# EAGLE board Speccy2007_128K_Ljubitel.bak1 (EAGLE 6.3)
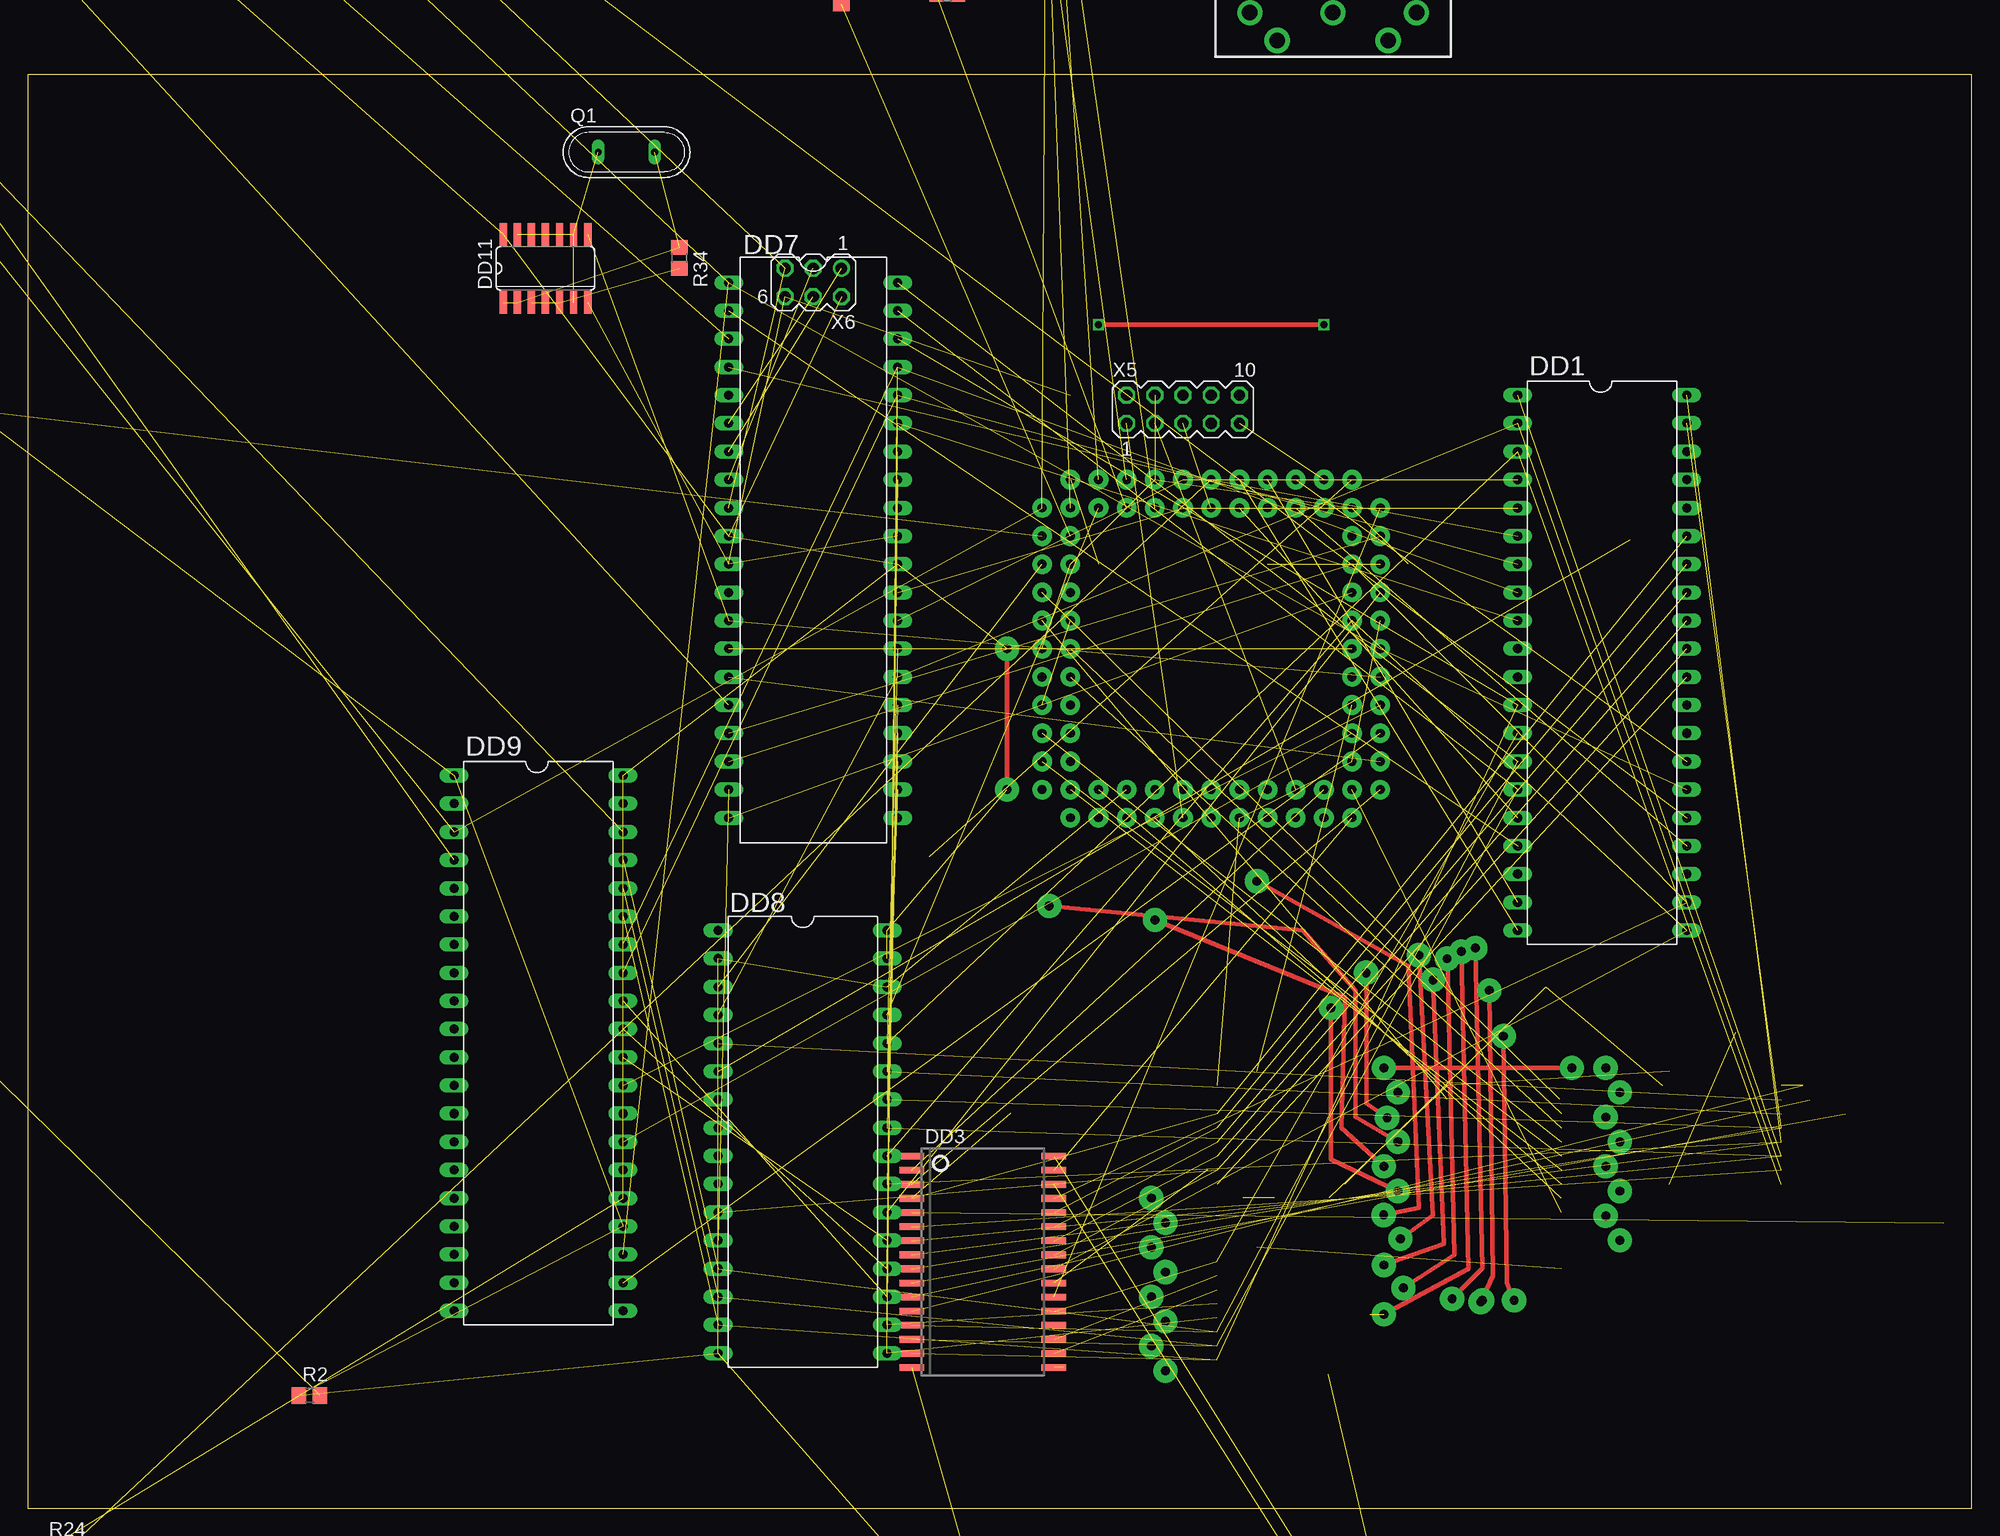
[diagram p0: board, top side]
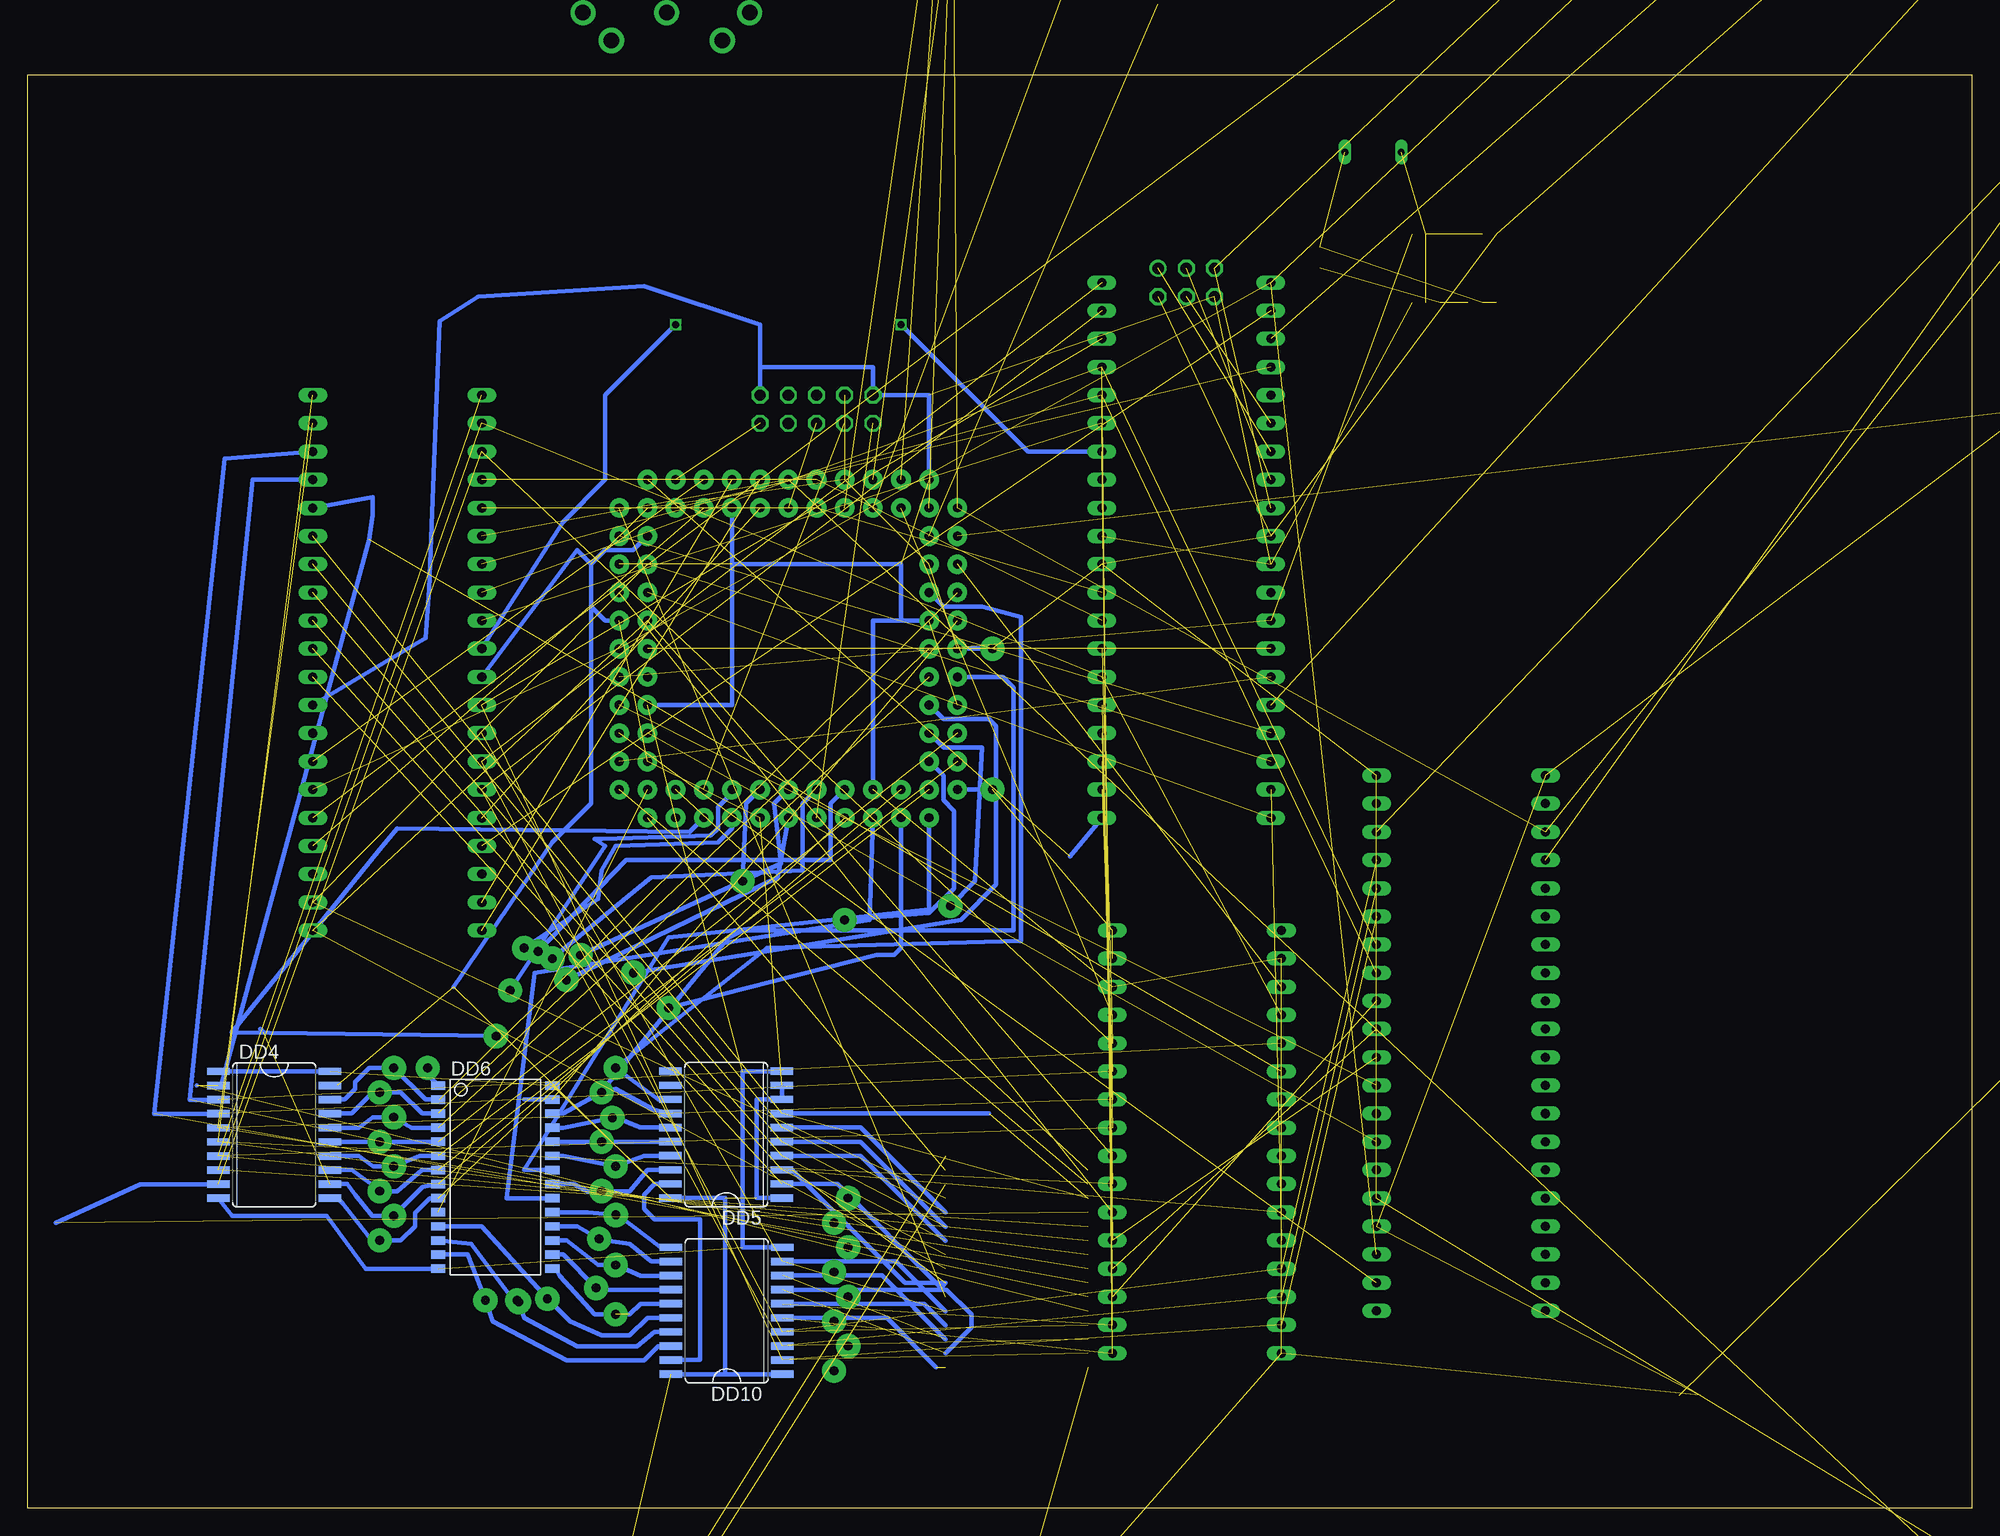
[diagram p1: board, bottom side, seen from below]

Size 175.24 x 129.21 mm. Coordinates in mm from the lower left corner, seen from the top.
Outline: 0,0 175.24,0 175.24,129.21 0,129.21 0,0
Copper layers (1*16): Top 0.035mm / dielectric 1.5mm / Bottom 0.035mm
Design rules "default": minimum track width 10mil, minimum drill 0.6mm, track to track 8mil, track to pad 8mil, pad to pad 8mil, via to via 8mil, smd to smd 8mil, copper to edge 40mil, drill to drill 8mil, minimum pad ring 10mil, minimum via ring 8mil, stop-mask expansion 4mil, vias tented up to drill 0mil, thermal gap 10mil

## Footprints (pad centres in the part's own frame; a part is rotated, then mirrored left to right if it is on the bottom)
C0805 = smd 1.3 x 1.5: 1 -0.95,0; 2 0.95,0
DIL40 = drill 0.813 long: 1 -24.13,-7.62; 2 -21.59,-7.62; 3 -19.05,-7.62; 4 -16.51,-7.62; 5 -13.97,-7.62; 6 -11.43,-7.62; 7 -8.89,-7.62; 8 -6.35,-7.62; 9 -3.81,-7.62; 10 -1.27,-7.62; 11 1.27,-7.62; 12 3.81,-7.62; 13 6.35,-7.62; 14 8.89,-7.62; 15 11.43,-7.62; 16 13.97,-7.62; 17 16.51,-7.62; 18 19.05,-7.62; 19 21.59,-7.62; 20 24.13,-7.62; 21 24.13,7.62; 22 21.59,7.62; 23 19.05,7.62; 24 16.51,7.62; 25 13.97,7.62; 26 11.43,7.62; 27 8.89,7.62; 28 6.35,7.62; 29 3.81,7.62; 30 1.27,7.62; 31 -1.27,7.62; 32 -3.81,7.62; 33 -6.35,7.62; 34 -8.89,7.62; 35 -11.43,7.62; 36 -13.97,7.62; 37 -16.51,7.62; 38 -19.05,7.62; 39 -21.59,7.62; 40 -24.13,7.62
PGA-84 = drill 0.8 pad 1.778: 1 5.08,5.08; 2 5.08,2.54; 3 2.54,5.08; 4 2.54,2.54; 5 0,5.08; 6 0,2.54; 7 -2.54,5.08; 8 -2.54,2.54; 9 -5.08,5.08; 10 -5.08,2.54; 11 -7.62,5.08; 12 -10.16,2.54; 13 -7.62,2.54; 14 -10.16,0; 15 -7.62,0; 16 -10.16,-2.54; 17 -7.62,-2.54; 18 -10.16,-5.08; 19 -7.62,-5.08; 20 -10.16,-7.62; 21 -7.62,-7.62; 22 -10.16,-10.16; 23 -7.62,-10.16; 24 -10.16,-12.7; 25 -7.62,-12.7; 26 -10.16,-15.24; 27 -7.62,-15.24; 28 -10.16,-17.78; 29 -7.62,-17.78; 30 -10.16,-20.32; 31 -7.62,-20.32; 32 -10.16,-22.86; 33 -7.62,-25.4; 34 -7.62,-22.86; 35 -5.08,-25.4; 36 -5.08,-22.86; 37 -2.54,-25.4; 38 -2.54,-22.86; 39 0,-25.4; 40 0,-22.86; 41 2.54,-25.4; 42 2.54,-22.86; 43 5.08,-25.4; 44 5.08,-22.86; 45 7.62,-25.4; 46 7.62,-22.86; 47 10.16,-25.4; 48 10.16,-22.86; 49 12.7,-25.4; 50 12.7,-22.86; 51 15.24,-25.4; 52 15.24,-22.86; 53 17.78,-25.4; 54 20.32,-22.86; 55 17.78,-22.86; 56 20.32,-20.32; 57 17.78,-20.32; 58 20.32,-17.78; 59 17.78,-17.78; 60 20.32,-15.24; 61 17.78,-15.24; 62 20.32,-12.7; 63 17.78,-12.7; 64 20.32,-10.16; 65 17.78,-10.16; 66 20.32,-7.62; 67 17.78,-7.62; 68 20.32,-5.08; 69 17.78,-5.08; 70 20.32,-2.54; 71 17.78,-2.54; 72 20.32,0; 73 17.78,0; 74 20.32,2.54; 75 17.78,5.08; 76 17.78,2.54; 77 15.24,5.08; 78 15.24,2.54; 79 12.7,5.08; 80 12.7,2.54; 81 10.16,5.08; 82 10.16,2.54; 83 7.62,5.08; 84 7.62,2.54
SOP32L = smd 0.6 x 2.2: 1 -9.525,-6.416; 2 -8.255,-6.416; 3 -6.985,-6.416; 4 -5.715,-6.416; 5 -4.445,-6.416; 6 -3.175,-6.416; 7 -1.905,-6.416; 8 -0.635,-6.416; 9 0.635,-6.416; 10 1.905,-6.416; 11 3.175,-6.416; 12 4.445,-6.416; 13 5.715,-6.416; 14 6.985,-6.416; 15 8.255,-6.416; 16 9.525,-6.416; 17 9.525,6.416; 18 8.255,6.416; 19 6.985,6.416; 20 5.715,6.416; 21 4.445,6.416; 22 3.175,6.416; 23 1.905,6.416; 24 0.635,6.416; 25 -0.635,6.416; 26 -1.905,6.416; 27 -3.175,6.416; 28 -4.445,6.416; 29 -5.715,6.416; 30 -6.985,6.416; 31 -8.255,6.416; 32 -9.525,6.416
SO20W = smd 0.66 x 2.032: 1 -5.715,-5.029; 2 -4.445,-5.029; 3 -3.175,-5.029; 4 -1.905,-5.029; 5 -0.635,-5.029; 6 0.635,-5.029; 7 1.905,-5.029; 8 3.175,-5.029; 9 4.445,-5.029; 10 5.715,-5.029; 11 5.715,5.029; 12 4.445,5.029; 13 3.175,5.029; 14 1.905,5.029; 15 0.635,5.029; 16 -0.635,5.029; 17 -1.905,5.029; 18 -3.175,5.029; 19 -4.445,5.029; 20 -5.715,5.029
SO28L = smd 0.762 x 1.27: 1 -7.62,-5.207; 2 -6.35,-5.207; 3 -5.08,-5.207; 4 -3.81,-5.207; 5 -2.54,-5.207; 6 -1.27,-5.207; 7 0,-5.207; 8 1.27,-5.207; 9 2.54,-5.207; 10 3.81,-5.207; 11 5.08,-5.207; 12 6.35,-5.207; 13 7.62,-5.207; 14 8.89,-5.207; 15 8.89,5.08; 16 7.62,5.08; 17 6.35,5.08; 18 5.08,5.08; 19 3.81,5.08; 20 2.54,5.08; 21 1.27,5.08; 22 0,5.08; 23 -1.27,5.08; 24 -2.54,5.08; 25 -3.81,5.08; 26 -5.08,5.08; 27 -6.35,5.08; 28 -7.62,5.08
DIL32 = drill 0.813 long: 1 -19.05,-7.62; 2 -16.51,-7.62; 3 -13.97,-7.62; 4 -11.43,-7.62; 5 -8.89,-7.62; 6 -6.35,-7.62; 7 -3.81,-7.62; 8 -1.27,-7.62; 9 1.27,-7.62; 10 3.81,-7.62; 11 6.35,-7.62; 12 8.89,-7.62; 13 11.43,-7.62; 14 13.97,-7.62; 15 16.51,-7.62; 16 19.05,-7.62; 17 19.05,7.62; 18 16.51,7.62; 19 13.97,7.62; 20 11.43,7.62; 21 8.89,7.62; 22 6.35,7.62; 23 3.81,7.62; 24 1.27,7.62; 25 -1.27,7.62; 26 -3.81,7.62; 27 -6.35,7.62; 28 -8.89,7.62; 29 -11.43,7.62; 30 -13.97,7.62; 31 -16.51,7.62; 32 -19.05,7.62
SO14 = smd 0.66 x 2.032: 1 -3.81,-3.073; 2 -2.54,-3.073; 3 -1.27,-3.073; 4 0,-3.073; 5 1.27,-3.073; 6 2.54,-3.073; 7 3.81,-3.073; 8 3.81,3.073; 9 2.54,3.073; 10 1.27,3.073; 11 0,3.073; 12 -1.27,3.073; 13 -2.54,3.073; 14 -3.81,3.073
TSOP48 = smd 1.1 x 0.3: 1 -9.625,5.75; 2 -9.625,5.25; 3 -9.625,4.75; 4 -9.625,4.25; 5 -9.625,3.75; 6 -9.625,3.25; 7 -9.625,2.75; 8 -9.625,2.25; 9 -9.625,1.75; 10 -9.625,1.25; 11 -9.625,0.75; 12 -9.625,0.25; 13 -9.625,-0.25; 14 -9.625,-0.75; 15 -9.625,-1.25; 16 -9.625,-1.75; 17 -9.625,-2.25; 18 -9.625,-2.75; 19 -9.625,-3.25; 20 -9.625,-3.75; 21 -9.625,-4.25; 22 -9.625,-4.75; 23 -9.625,-5.25; 24 -9.625,-5.75; 25 9.625,-5.75; 26 9.625,-5.25; 27 9.625,-4.75; 28 9.625,-4.25; 29 9.625,-3.75; 30 9.625,-3.25; 31 9.625,-2.75; 32 9.625,-2.25; 33 9.625,-1.75; 34 9.625,-1.25; 35 9.625,-0.75; 36 9.625,-0.25; 37 9.625,0.25; 38 9.625,0.75; 39 9.625,1.25; 40 9.625,1.75; 41 9.625,2.25; 42 9.625,2.75; 43 9.625,3.25; 44 9.625,3.75; 45 9.625,4.25; 46 9.625,4.75; 47 9.625,5.25; 48 9.625,5.75
A0R-JMP = smd 1.5 x 1.3: 1 0,1.7; 2 0,0; 3 0,-1.7
QS = drill 0.61 long: 1 -2.54,0; 2 2.54,0
R0805 = smd 1.3 x 1.5: 1 -0.95,0; 2 0.95,0
DIN_5_FEMALE_SUPPORT = drill 1.4 pad 2.286: 1 7.94,3.6; 2 0.46,3.61; 3 -7.07,3.6; 4 5.47,6.13; 5 -4.53,6.12; 6 -4.53,-6.382; 7 5.478,-6.382
MINI-DIN6 = drill 0.9: 1 -1.3,-8.5; 2 1.3,-8.5; 3 -3.4,-8.5; 4 3.4,-8.5; 5 -3.4,-11; 6 3.4,-11 | drill 2.2: P$1 0,-4.7
MA05-2 = drill 1.016 octagon: 1 -5.08,-1.27; 2 -5.08,1.27; 3 -2.54,-1.27; 4 -2.54,1.27; 5 0,-1.27; 6 0,1.27; 7 2.54,-1.27; 8 2.54,1.27; 9 5.08,-1.27; 10 5.08,1.27
MA03-2 = drill 1.016: 1 -2.54,-1.27 | drill 1.016 octagon: 2 -2.54,1.27; 3 0,-1.27; 4 0,1.27; 5 2.54,-1.27; 6 2.54,1.27

## Placement (x,y rotation side)
C13  1m  [C0805]  -64.77,161.29 0 top  (outside the outline)
C14  1m  [C0805]  -64.77,149.86 0 top  (outside the outline)
C15  0.1  [C0805]  -64.77,166.37 0 top  (outside the outline)
DD1  Z80  [DIL40]  141.92,76.2 270 top
DD2  EPM7128-J84  [PGA-84]  116.84,82.55 270 top
DD3  621024  [SOP32L]  86.09,22.2 270 top
DD4  74HCT245DW  [SO20W]  153.03,33.65 270 bottom
DD5  74HCT245DW  [SO20W]  112.28,33.67 90 bottom
DD6  62256  [SO28L]  133.03,30.48 270 bottom
DD7  MEGA16-P  [DIL40]  70.8,86.36 270 top
DD8  W29C020C  [DIL32]  69.85,33.02 270 top
DD9  YM2149F  [DIL40]  46.04,41.91 270 top
DD10  74HCT245DW  [SO20W]  112.23,17.79 90 bottom
DD11  74HC00D  [SO14]  46.67,111.76 0 top
IC1  SST39LF800A  [TSOP48]  81.88,-24.13 0 top  (outside the outline)
JMP1  [A0R-JMP]  124.78,-21.59 0 top  (outside the outline)
Q1  14Mhz  [QS]  53.98,122.24 0 top
R1  4k7  [R0805]  -71.12,106.68 0 top  (outside the outline)
R2  2k2  [R0805]  25.4,10.16 0 top
R4  330  [R0805]  73.34,136.53 90 top  (outside the outline)
R5  470  [R0805]  82.87,136.53 0 top  (outside the outline)
R6  470  [R0805]  92.71,158.75 0 top  (outside the outline)
R7  470  [R0805]  92.71,146.05 0 top  (outside the outline)
R8  330  [R0805]  92.71,165.1 0 top  (outside the outline)
R9  330  [R0805]  92.71,152.4 0 top  (outside the outline)
R10  330  [R0805]  92.71,139.7 0 top  (outside the outline)
R19  10k  [R0805]  -64.77,236.22 0 top  (outside the outline)
R20  10k  [R0805]  -64.77,229.87 0 top  (outside the outline)
R21  10k  [R0805]  -64.77,223.52 0 top  (outside the outline)
R22  4k7  [R0805]  -64.77,217.17 0 top  (outside the outline)
R23  4k7  [R0805]  -64.77,210.82 0 top  (outside the outline)
R24  2k2  [R0805]  2.54,-3.81 0 top  (outside the outline)
R25  1k  [R0805]  -64.77,204.47 0 top  (outside the outline)
R26  2k  [R0805]  -64.77,198.12 0 top  (outside the outline)
R27  2k  [R0805]  -64.77,191.77 0 top  (outside the outline)
R28  1k  [R0805]  -64.77,185.42 0 top  (outside the outline)
R29  5k1  [R0805]  -64.77,156.21 0 top  (outside the outline)
R30  4k7  [R0805]  -64.77,179.07 0 top  (outside the outline)
R31  4k7  [R0805]  -64.77,172.72 0 top  (outside the outline)
R32  5k1  [R0805]  -64.77,143.51 0 top  (outside the outline)
R33  4k7  [R0805]  -64.77,137.16 0 top  (outside the outline)
R34  360  [R0805]  58.74,112.71 270 top
U$1  MIDI_CONN_FEMALE_SUPPORT  [DIN_5_FEMALE_SUPPORT]  118.11,138.43 180 top  (outside the outline)
U$2  MINI-DIN6PTH  [MINI-DIN6]  77.47,162.56 0 top  (outside the outline)
X5  ByteBlaster  [MA05-2]  104.14,99.06 0 top
X6  AVRISP  [MA03-2]  70.8,110.49 180 top

## Library data of the parts
C13-C15 R1 R2 R4-R10 R19-R34 = rcl
DD1 = zilog
DD2 = altera_pga84
DD3 IC1 = memory
DD4 DD5 DD10 DD11 = 74xx-eu
DD6 = memory-hitachi; MPN: CY62256VNLL-70SNXI; OC_FARNELL: 1650073; OC_NEWARK: 19M2582
DD7 = atmel; MPN: ATMEGA16-16PU; OC_FARNELL: 9171142; OC_NEWARK: 01M6885
DD8 = w29c020
DD9 = ref-pack_
JMP1 = jump-0r-smd
Q1 = special
U$1 U$2 = SparkFun-Connectors
X5 X6 = con-lstb; OC_FARNELL: unknown; OC_NEWARK: unknown

## Nets
+3V3: JMP1.3
+5V: DD1.11 DD2.3 DD2.13 DD2.26 DD2.38 DD2.43 DD2.53 DD2.66 DD2.78 DD3.32 DD4.1 DD4.20 DD5.1 DD5.8 DD5.9 DD5.20 DD6.28 DD7.10 DD7.30 DD8.31 DD8.32 DD9.25 DD9.28 DD9.40 DD10.1 DD10.20 DD11.14 JMP1.1 R19.1 R20.1 R21.1 R22.1 R23.1 R24.1 X5.4 X6.2
A: DD9.4 R25.1
A0: DD1.30 DD3.23 DD5.2 DD7.19 DD8.12
A1: DD1.31 DD3.25 DD5.3 DD8.11
A2: DD1.32 DD3.26 DD5.4 DD8.10
A3: DD1.33 DD3.27 DD5.5 DD8.9
A4: DD1.34 DD3.28 DD5.6 DD8.8
A5: DD1.35 DD3.4 DD5.7 DD8.7
A6: DD1.36 DD3.12 DD4.2 DD8.6
A7: DD1.37 DD3.11 DD4.3 DD8.5
A8: DD1.38 DD3.10 DD4.4 DD7.22 DD8.27
A9: DD1.39 DD3.9 DD4.5 DD7.23 DD8.26
A10: DD1.40 DD3.8 DD4.6 DD7.24 DD8.23
A11: DD1.1 DD3.7 DD4.7 DD7.25 DD8.25
A12: DD1.2 DD3.6 DD4.8 DD7.26 DD8.4
A13: DD1.3 DD3.5 DD4.9 DD7.27 DD8.28
A14: DD1.4 DD2.24 DD7.28
A15: DD1.5 DD2.25 DD7.29
AVR_INT: DD2.9 DD7.17
AVR_NOINT: DD2.6 DD7.20
AVR_PROM: DD2.2 DD7.14
AVR_RST: DD7.9 R19.2 X6.5
AVR_TRDOS: DD2.77 DD7.15
AVR_WAIT: DD2.15 DD7.4
AY_BC: DD2.81 DD9.29
AY_BDIR: DD2.80 DD9.27
AY_CLK: DD2.79 DD9.22
B: DD2.33 DD9.3 R10.1 R26.1 R27.1
BB: DD2.28 R7.1
BG: DD2.27 R6.1
BR: DD2.29 R5.1
BUSRQ: DD1.25 R21.2
C: DD9.38 R28.1
CLK: DD2.83 DD7.13 DD11.8
CLK_CPU: DD1.6 DD2.22 R24.2
D0: DD1.14 DD3.13 DD7.40 DD8.13 DD9.37 DD10.4
D1: DD1.15 DD3.14 DD7.39 DD8.14 DD9.36 DD10.3
D2: DD1.12 DD3.15 DD7.38 DD8.15 DD9.35 DD10.2
D3: DD1.8 DD3.17 DD7.37 DD8.17 DD9.34 DD10.5
D4: DD1.7 DD3.20 DD7.36 DD8.18 DD9.33 DD10.6
D5: DD1.9 DD3.18 DD7.35 DD8.19 DD9.32 DD10.7
D6: DD1.10 DD3.19 DD7.34 DD8.20 DD9.31 DD10.8
D7: DD1.13 DD3.21 DD7.33 DD8.21 DD9.30 DD10.9
G: DD2.34 R9.1
GND: DD1.29 DD2.7 DD2.19 DD2.32 DD2.42 DD2.47 DD2.59 DD2.72 DD2.82 DD3.16 DD4.10 DD5.10 DD6.14 DD7.11 DD7.31 DD8.2 DD8.16 DD8.30 DD9.1 DD9.24 DD10.10 DD11.7 IC1.27 IC1.46 R2.1 R29.2 R32.2 X5.2 X5.10 X6.6
INT: DD1.16 DD2.21
IOREQ: DD1.20 DD2.20
KCLK: DD7.16 R23.2
KDAT: DD7.3 R22.2
M1: DD1.27 DD2.16
MISO: DD7.7 X6.1
MOSI: DD7.6 X6.4
MREQ: DD1.19 DD2.18
N$1: DD11.1 DD11.2 Q1.2 R34.1
N$2: C15.1 R30.2 R31.2
N$3: C15.2 R33.1
N$4: C13.1 R25.2 R26.2 R29.1 R30.1
N$5: DD11.3 DD11.4 DD11.5 R34.2
N$6: R4.2
N$7: C14.1 R27.2 R28.2 R31.1 R32.1
N$8: R5.2 R8.2
N$9: R6.2 R9.2
N$10: R7.2 R10.2
N$11: U$1.3
N$12: DD11.6 DD11.9 DD11.10 DD11.12 DD11.13 Q1.1
N$21: DD3.30 JMP1.2
NMI: DD1.17 DD7.2
R: DD2.30 R8.1
RAM_A14: DD2.75 DD3.3
RAM_A15: DD2.74 DD3.31
RAM_A16: DD2.73 DD3.2
RAM_CS: DD2.11 DD3.22
RD: DD1.21 DD2.4 DD3.24 DD8.24
ROM_A14: DD2.31 DD8.29
ROM_A15: DD2.37 DD8.3
ROM_CS: DD2.5 DD8.22
RST_CPU: DD1.26 DD2.1 DD7.1 DD9.23 R20.2
SCK: DD7.8 X6.3
SDC: DD7.5
SOUND_L: C14.2 R1.1 R2.2
SOUND_R: C13.2
SPEAKER: DD2.35 R1.2 R33.2
SYNC: DD2.36 R4.1
TAPE_IN: DD2.12 DD7.21
TCK: DD2.62 X5.1
TDI: DD2.14 X5.9
TDO: DD2.71 X5.3
TMS: DD2.23 X5.5
VA0: DD2.56 DD5.18 DD6.21
VA1: DD2.52 DD5.17 DD6.23
VA2: DD2.50 DD5.16 DD6.24
VA3: DD2.48 DD5.15 DD6.25
VA4: DD2.45 DD5.14 DD6.26
VA5: DD2.40 DD5.13 DD6.1
VA6: DD2.39 DD4.18 DD6.2
VA7: DD2.44 DD4.17 DD6.3
VA8: DD2.46 DD4.16 DD6.4
VA9: DD2.49 DD4.15 DD6.5
VA10: DD2.51 DD4.14 DD6.6
VA11: DD2.55 DD4.13 DD6.7
VA12: DD2.57 DD4.12 DD6.8
VA13: DD2.60 DD4.11 DD6.9
VA14: DD2.76 DD6.10
VAGEN: DD2.10 DD4.19 DD5.19 DD10.19
VD0: DD2.68 DD6.11 DD10.16
VD1: DD2.69 DD6.12 DD10.17
VD2: DD2.70 DD6.13 DD10.18
VD3: DD2.61 DD6.15 DD10.15
VD4: DD2.63 DD6.16 DD10.14
VD5: DD2.64 DD6.17 DD10.13
VD6: DD2.65 DD6.18 DD10.12
VD7: DD2.67 DD6.19 DD10.11
VDD: IC1.37
VRAM: DD2.58 DD6.20
VRD: DD2.54 DD6.22
VWR: DD2.41 DD6.27
WAIT_CPU: DD1.24 DD2.17
WR: DD1.22 DD2.8 DD3.29 DD7.18

## Tracks (layer width: path | path; a pad name or v marks a point on that pad's centre or on a via)
+5V  (via drill 0.8 pad 2.18)  (28 unrouted)
  Top 0.406: v88.27,77.47 v88.27,64.77
  Bottom 0.406: DD1.11 125.73,86.36 124.46,85.09 124.46,81.28 123.19,80.01 DD2.3 | DD4.1 DD4.20 | DD10.1 DD10.20 112.39,12.07 112.39,27.95 DD5.20 | DD2.43 v88.27,77.47 | v88.27,64.77 DD2.53 | DD5.1 109.54,27.95 109.54,36.83 DD5.8 DD5.9
A  (1 unrouted)
A0  (4 unrouted)
  Bottom 0.406: DD5.2 102.25,29.22 93.03,20 92.8,20 DD3.23 96.18,20.3 106.36,30.48
A1  (3 unrouted)
A2  (3 unrouted)
  Bottom 0.406: DD5.4 100.16,31.76 DD3.26
A3  (3 unrouted)
  Bottom 0.406: DD5.5 100.16,33.03 DD3.27
A4  (3 unrouted)
  Bottom 0.406: DD5.6 100.16,34.3 DD3.28
A5  (3 unrouted)
  Bottom 0.406: DD5.7 88.59,35.57 88.58,35.56
A6  (3 unrouted)
  Bottom 0.406: DD4.2 157.8,38.09 144.46,87.31 144.15,89.53 144.15,91.12 DD1.36 | 160.01,38.09 160.02,38.1
A7  (2 unrouted)
  Bottom 0.406: DD4.3 160.66,36.82 154.94,92.71 DD1.37
A8  (3 unrouted)
  Bottom 0.406: DD4.4 163.83,35.55 157.48,94.61 DD1.38
A9  (4 unrouted)
A10  (4 unrouted)
A11  (4 unrouted)
A12  (4 unrouted)
A13  (4 unrouted)
  Bottom 0.406: DD4.9 165.11,29.2 172.72,25.72
A14  (2 unrouted)
A15  (2 unrouted)
AVR_INT  (1 unrouted)
AVR_NOINT  (1 unrouted)
AVR_PROM  (1 unrouted)
AVR_RST  (2 unrouted)
AVR_TRDOS  (1 unrouted)
AVR_WAIT  (1 unrouted)
AY_BC  (1 unrouted)
AY_BDIR  (1 unrouted)
AY_CLK  (1 unrouted)
B  (4 unrouted)
BB  (1 unrouted)
BG  (1 unrouted)
BR  (1 unrouted)
BUSRQ  (1 unrouted)
C  (1 unrouted)
CLK  (2 unrouted)
CLK_CPU  (2 unrouted)
D0  (5 unrouted)
D1  (5 unrouted)
D2  (5 unrouted)
D3  (5 unrouted)
  Bottom 0.406: DD10.5 97.8,17.16 93.34,12.7
D4  (5 unrouted)
  Bottom 0.406: DD10.6 94.44,18.43 DD3.20
D5  (5 unrouted)
  Bottom 0.406: DD10.7 92.4,19.7 90.17,17.46 90.17,16.28 DD3.18
D6  (via drill 0.6)  (4 unrouted)
  Top 0.406: v116.84,106.68 v96.52,106.68
  Bottom 0.406: DD1.10 127,88.9 123.19,92.71 123.19,100.33 v116.84,106.68 | v96.52,106.68 85.09,95.25 DD7.34 | DD10.8 98.25,20.96 DD3.19
D7  (5 unrouted)
  Bottom 0.406: DD10.9 96.98,22.23 DD3.21
G  (1 unrouted)
GND  (21 unrouted)
  Bottom 0.406: DD2.32 93.98,100.33 X5.2 99.06,102.87 109.22,102.87 X5.10 109.22,106.68 119.7,110.17 134.62,109.22 138.11,107 139.06,82.87 139.38,78.42 DD1.29 | DD2.19 111.76,85.09 | 111.76,85.09 96.52,85.09 96.52,80.01 | 96.52,80.01 DD2.42 | 111.76,85.09 111.76,72.39 DD2.82 | DD2.59 99.06,80.01 96.52,80.01 | DD4.10 156.79,26.35 148.27,26.35 144.78,21.59 DD6.14 | DD10.10 110.81,23.51 110.81,39.37 DD5.10
INT  (1 unrouted)
IOREQ  (1 unrouted)
KCLK  (1 unrouted)
KDAT  (1 unrouted)
M1  (1 unrouted)
MISO  (1 unrouted)
MOSI  (1 unrouted)
MREQ  (1 unrouted)
N$1  (3 unrouted)
N$2  (2 unrouted)
N$3  (1 unrouted)
N$4  (4 unrouted)
N$5  (3 unrouted)
N$7  (4 unrouted)
N$8  (1 unrouted)
N$9  (1 unrouted)
N$10  (1 unrouted)
N$12  (5 unrouted)
N$13  (via drill 0.8 pad 2.18)
  other vias: 142.24,39.69
N$14  (via drill 0.8 pad 2.18)
  other vias: 142.24,35.24
N$15  (via drill 0.8 pad 2.18)
  other vias: 143.51,37.47
N$16  (via drill 0.8 pad 2.18)
  other vias: 143.51,28.58
N$17  (via drill 0.8 pad 2.18)
  other vias: 143.51,33.02
N$18  (via drill 0.8 pad 2.18)
  other vias: 142.24,30.8
N$19  (via drill 0.8 pad 2.18)
  other vias: 143.51,24.13
N$20  (via drill 0.8 pad 2.18)
  other vias: 142.24,26.35
N$21  (1 unrouted)
N$22  (via drill 0.8 pad 2.18)
  other vias: 51.75,-15.56
N$23  (via drill 0.8 pad 2.18)
  other vias: 123.51,37.47
N$24  (via drill 0.8 pad 2.18)
  other vias: 59.69,-15.87
N$25  (via drill 0.8 pad 2.18)
  other vias: 123.51,33.02
N$26  (via drill 0.8 pad 2.18)
  other vias: 122.24,30.8
N$27  (via drill 0.8 pad 2.18)
  other vias: 101.28,27.94
N$28  (via drill 0.8 pad 2.18)
  other vias: 101.28,23.5
N$29  (via drill 0.8 pad 2.18)
  other vias: 55.56,-15.56
N$30  (via drill 0.8 pad 2.18)
  other vias: 122.24,21.91
N$31  (via drill 0.8 pad 2.18)
  other vias: 52.07,-19.05
N$32  (via drill 0.8 pad 2.18)
  other vias: 133.99,18.73
N$33  (via drill 0.8 pad 2.18)
  other vias: 56.2,-19.05
N$34  (via drill 0.8 pad 2.18)
  other vias: 122.24,17.46
N$35  (via drill 0.8 pad 2.18)
  other vias: 60.01,-19.68
N$36  (via drill 0.8 pad 2.18)
  other vias: 131.13,18.73
N$37  (via drill 0.8 pad 2.18)
  other vias: 102.55,25.72
N$38  (via drill 0.8 pad 2.18)
  other vias: 102.55,16.83
N$39  (via drill 0.8 pad 2.18)
  other vias: 102.55,21.27
N$40  (via drill 0.8 pad 2.18)
  other vias: 101.28,19.05
N$41  (via drill 0.8 pad 2.18)
  other vias: 102.55,12.38
N$42  (via drill 0.8 pad 2.18)
  other vias: 101.28,14.61
NMI  (1 unrouted)
R  (1 unrouted)
RAM_A14  (1 unrouted)
RAM_A15  (1 unrouted)
RAM_A16  (1 unrouted)
RAM_CS  (1 unrouted)
RD  (3 unrouted)
ROM_A14  (1 unrouted)
ROM_A15  (1 unrouted)
ROM_CS  (1 unrouted)
RST_CPU  (4 unrouted)
SCK  (1 unrouted)
SOUND_L  (2 unrouted)
SPEAKER  (2 unrouted)
SYNC  (1 unrouted)
TAPE_IN  (1 unrouted)
  Bottom 0.406: DD7.21 81.28,58.74
TCK  (1 unrouted)
TDI  (1 unrouted)
TDO  (1 unrouted)
TMS  (1 unrouted)
VA0  (via drill 0.8 pad 2.18)
  Top 0.406: v117.47,45.09 117.47,31.43 v123.51,28.58
  Bottom 0.406: DD5.18 119.37,30.49 120.97,28.58 v123.51,28.58 124.78,28.58 126.05,29.21 DD6.21 | DD2.56 96.52,50.48 97.16,49.85 98.74,49.85 v117.47,45.09
VA1  (via drill 0.8 pad 2.18)  (1 unrouted)
  Top 0.406: v101.6,53.02 118.75,46.04 118.43,34.29 122.24,30.8
  Bottom 0.406: 127.94,31.76 DD6.23 127,31.75 122.24,30.8 119.69,31.76 DD5.17 | DD2.52 92.71,66.04 92.71,63.82 91.76,62.87 91.76,55.88 93.98,53.66 v101.6,53.02
VA2  (via drill 0.8 pad 2.18)
  Top 0.406: v92.08,54.29 114.94,52.07 119.7,46.67 119.7,35.26 v123.51,33.03
  Bottom 0.406: DD5.16 v123.51,33.03 127.94,33.03 DD6.24 | DD2.50 92.71,68.58 89.22,68.58 89.85,56.52 v92.08,54.29
VA3  (via drill 0.8 pad 2.18)
  Top 0.406: v120.65,48.26 120.65,36.46 v122.54,35.18
  Bottom 0.406: DD5.15 120.03,34.3 122.24,35.24 v122.54,35.18 127,34.29 DD6.25 | DD2.48 92.71,71.12 88.58,71.12 87.95,70.48 87.95,56.2 91.12,53.02 v120.65,48.26
VA4
  Bottom 0.406: DD5.14 118.76,35.89 122.24,37.78 123.51,37.47 123.77,37.32 | 123.77,37.32 127,35.56 DD6.26 | DD2.45 87.31,74.93 86.36,73.98 86.36,52.07 110.81,52.07 112.08,51.44 123.51,37.59 123.77,37.32
VA5  (via drill 0.8 pad 2.18)
  Top 0.406: v122.24,39.69 v139.19,39.69
  Bottom 0.406: DD5.13 118.44,36.84 v122.24,39.69 108.58,50.48 85.72,51.12 85.72,80.33 89.22,81.28 92.71,81.28 DD2.40 | v139.19,39.69 139.19,39.05 DD6.1
VA6  (1 unrouted)
  Bottom 0.406: 138.11,36.83 DD6.2 139.38,36.83 142.24,39.69 144.46,39.69 145.73,38.42 145.73,37.78 146.69,36.83 147.99,36.83 DD4.18
VA7  (1 unrouted)
  Bottom 0.406: DD6.3 139.7,35.56 141.6,37.47 144.15,37.47 146.05,35.56 147.99,35.56 DD4.17
VA8  (1 unrouted)
  Bottom 0.406: DD6.4 140.65,34.29 142.24,35.24 144.15,35.24 145.41,34.29 147.99,34.29 DD4.16
VA9  (1 unrouted)
  Bottom 0.406: DD6.5 147.99,33.02 DD4.15
VA10  (1 unrouted)
  Bottom 0.406: DD6.6 139.9,31.75 142.24,30.8 144.09,30.8 145.41,31.75 147.99,31.75 DD4.14
VA11  (1 unrouted)
  Bottom 0.406: DD6.7 139.7,30.48 141.92,28.58 143.4,28.58 146.05,30.48 147.99,30.48 DD4.13
VA12  (2 unrouted)
  Bottom 0.406: DD6.8 139.64,28.95 142.24,26.35 144.2,26.35 145.73,28.26 146.43,29.21 147.99,29.21 DD4.12 | 153.99,42.86 154.31,43.18
VA13  (1 unrouted)
  Bottom 0.406: DD6.9 139.01,27.94 140.34,26.61 140.34,25.4 141.6,24.13 143.51,24.13 144.55,24.54 146.86,27.48 147.32,27.94 147.99,27.94 DD4.11
VA14  (1 unrouted)
VAGEN  (2 unrouted)
  Bottom 0.406: DD4.19 147.33,38.09 | DD10.19 114.62,13.35 114.62,26.04 118.75,26.04 119.7,26.99 119.7,28.26 118.75,29.21 117.32,29.21 DD5.19 | 136.84,46.99 127.95,60.01 124.46,63.5 124.46,85.09 123.19,86.36 120.65,86.36 DD2.10
VD0  (via drill 0.8 pad 2.18)
  Top 0.406: v130.49,50.48 131.13,21.6 v128.4,18.87
  Bottom 0.406: DD6.11 134.3,25.4 v128.4,18.87 126.36,16.83 123.51,15.56 120.97,15.56 119.37,17.16 DD10.16 | DD2.68 111.76,61.28 113.03,60.01 122.24,59.69 123.51,57.47 123.83,54.93 v130.49,50.48
VD1  (via drill 0.8 pad 2.18)
  Top 0.406: v131.76,46.67 132.08,20.95 v130.97,18.57
  Bottom 0.406: DD6.12 135.25,23.81 131.44,18.73 v130.97,18.57 130.49,17.14 125.73,14.61 120.33,14.61 118.75,15.88 117.27,15.88 DD10.17 | DD2.69 111.76,64.45 113.03,63.18 113.03,61.28 113.67,60.64 123.51,60.33 124.14,60.33 123.19,59.69 v131.76,46.67
VD2  (via drill 0.8 pad 2.18)  (1 unrouted)
  Top 0.406: v133.03,42.55 133.35,20.32 133.99,18.73
  Bottom 0.406: DD6.13 135.57,22.86 133.99,18.73 133.35,16.83 126.68,13.34 119.7,13.34 118.43,14.61 117.27,14.61 DD10.18 | DD2.70 115.57,60.96 141.92,61.28 143.51,59.37 156.84,42.86 v133.03,42.55
VD3  (via drill 0.8 pad 2.18)  (1 unrouted)
  Top 0.406: v129.22,50.16 129.86,21.59 122.24,17.46
  Bottom 0.406: DD6.15 127.64,21.59 127.32,20.95 124.14,17.46 120.97,17.46 120.02,18.41 117.27,18.41 DD10.15 | DD2.61 102.87,63.5 102.87,58.42 121.28,58.42 v129.22,50.16
VD4  (via drill 0.8 pad 2.18)
  Top 0.406: v127.95,49.53 128.59,22.84 v124,19.84
  Bottom 0.406: DD6.16 127,22.86 v124,19.84 123.19,19.69 117.27,19.69 DD10.14 | DD2.63 105.41,63.5 105.41,57.47 119.06,56.83 v127.95,49.53
VD5  (via drill 0.8 pad 2.18)  (1 unrouted)
  Top 0.406: v126.68,47.62 127.64,23.81 122.24,21.91
  Bottom 0.406: DD6.17 126.68,24.13 123.83,21.91 122.24,21.91 120.02,20.95 117.27,20.95 DD10.13 | DD2.64 107.63,56.83 v126.68,47.62
VD6  (via drill 0.8 pad 2.18)
  Top 0.406: v125.41,49.85 126.68,26.41 v123.75,24.27
  Bottom 0.406: DD6.18 125.73,25.4 v123.75,24.27 123.19,24.13 120.97,23.81 119.06,22.23 117.27,22.23 DD10.12 | DD2.65 107.95,63.5 107.31,58.1 v125.41,49.85
VD7  (via drill 0.8 pad 2.18)
  Top 0.406: v110.81,56.52 124.46,48.9 125.41,27.05 v122.23,26.42
  Bottom 0.406: DD6.19 124.78,26.67 v122.23,26.42 121.92,26.35 118.2,23.5 DD10.11 | DD2.67 110.49,63.5 v110.81,56.52
VRAM
  Bottom 0.406: DD6.20 132.08,27.94 129.54,48.26 99.38,53.02 DD2.58
VRD
  Bottom 0.406: DD6.22 130.49,30.48 117.47,51.44 93.98,53.98 DD2.54
VWR  (1 unrouted)
  Bottom 0.406: DD6.27 130.49,36.83
WAIT_CPU  (1 unrouted)
WR  (3 unrouted)
(copper drawn outside any net)
  shapes: Top area x2